# Altium PCB Jtag2UPDI.PcbDoc
Units mm, origin at the board's own origin, x right, y up, seen from the top; angles counter-clockwise.
Board outline 62.86 x 49.02 mm, 2 copper layers (Top Layer, Bottom Layer), stack 0.871 mm thick; 22 components, 22 nets, 119 pads, 17 vias.
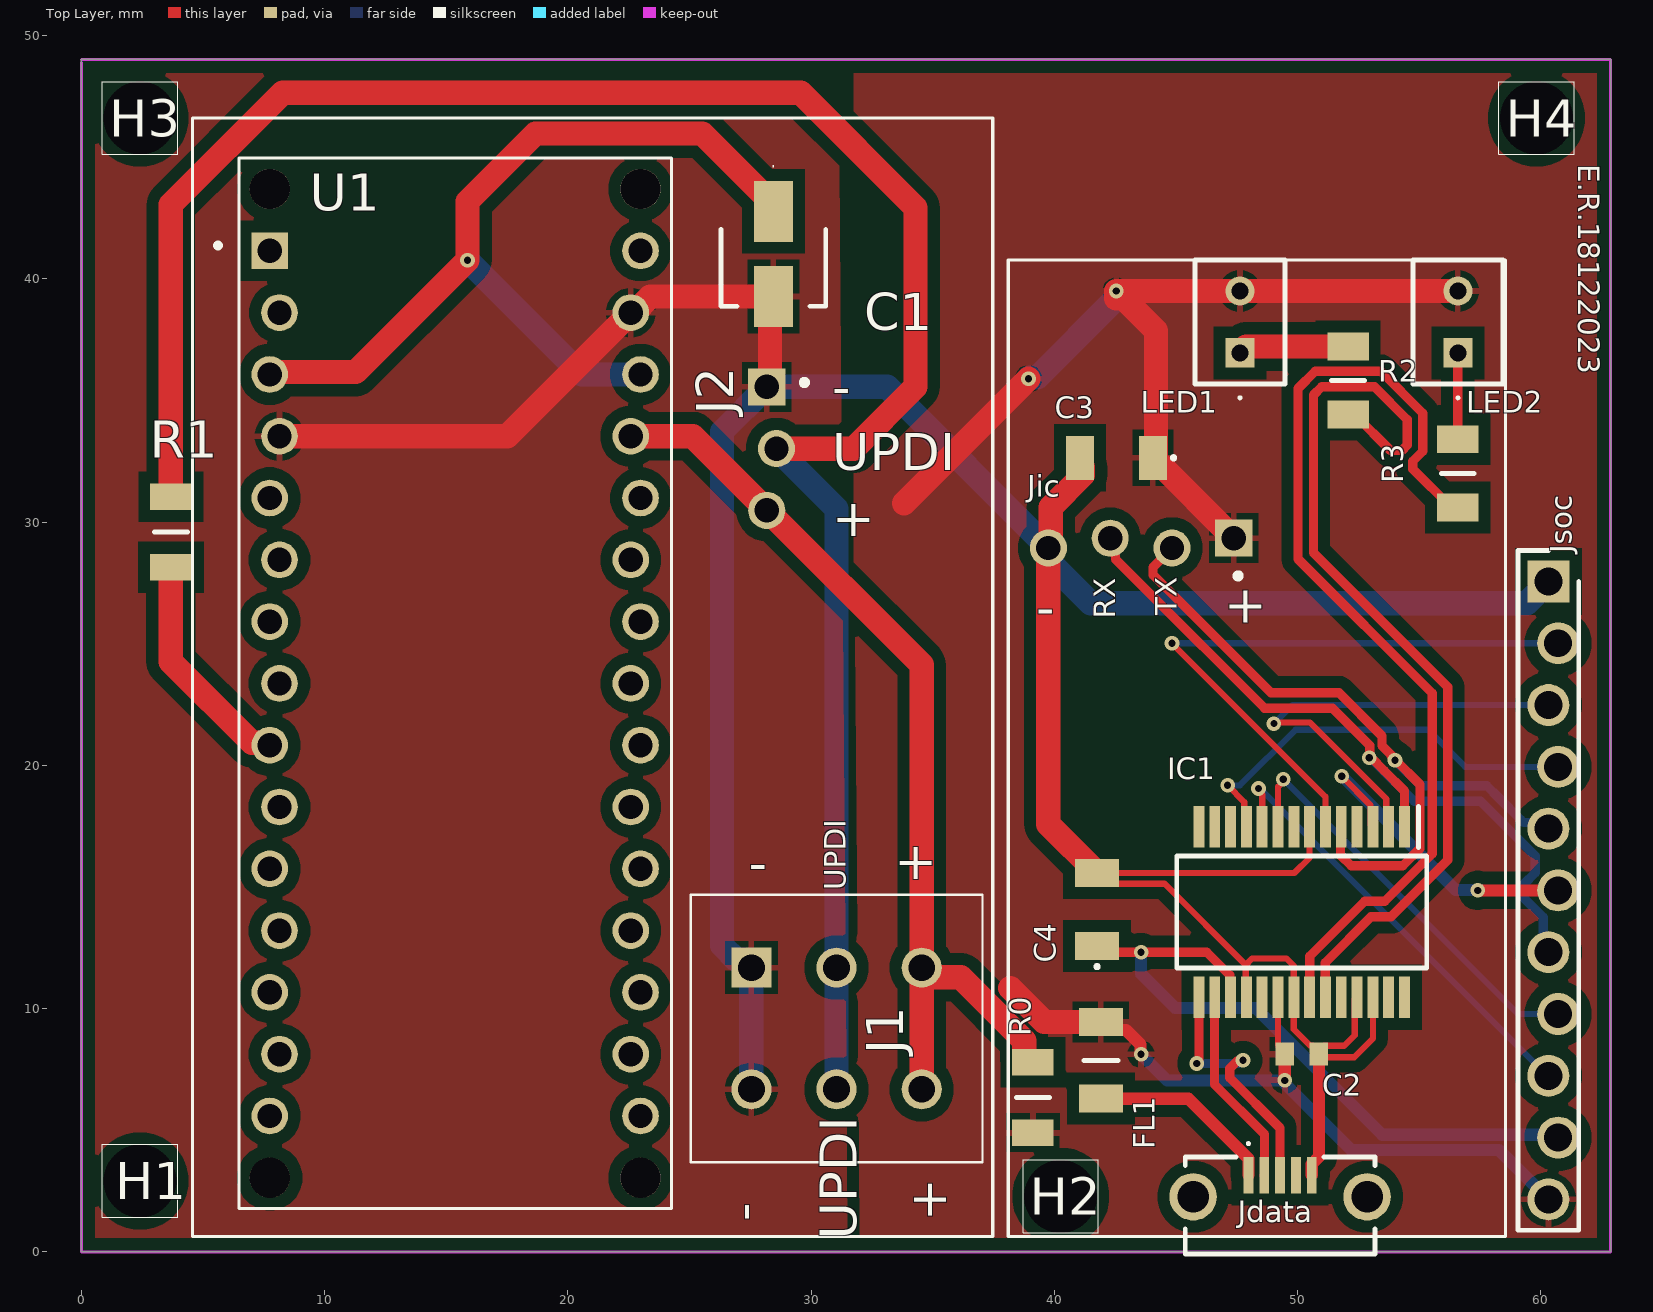
[diagram p0: Top Layer view]
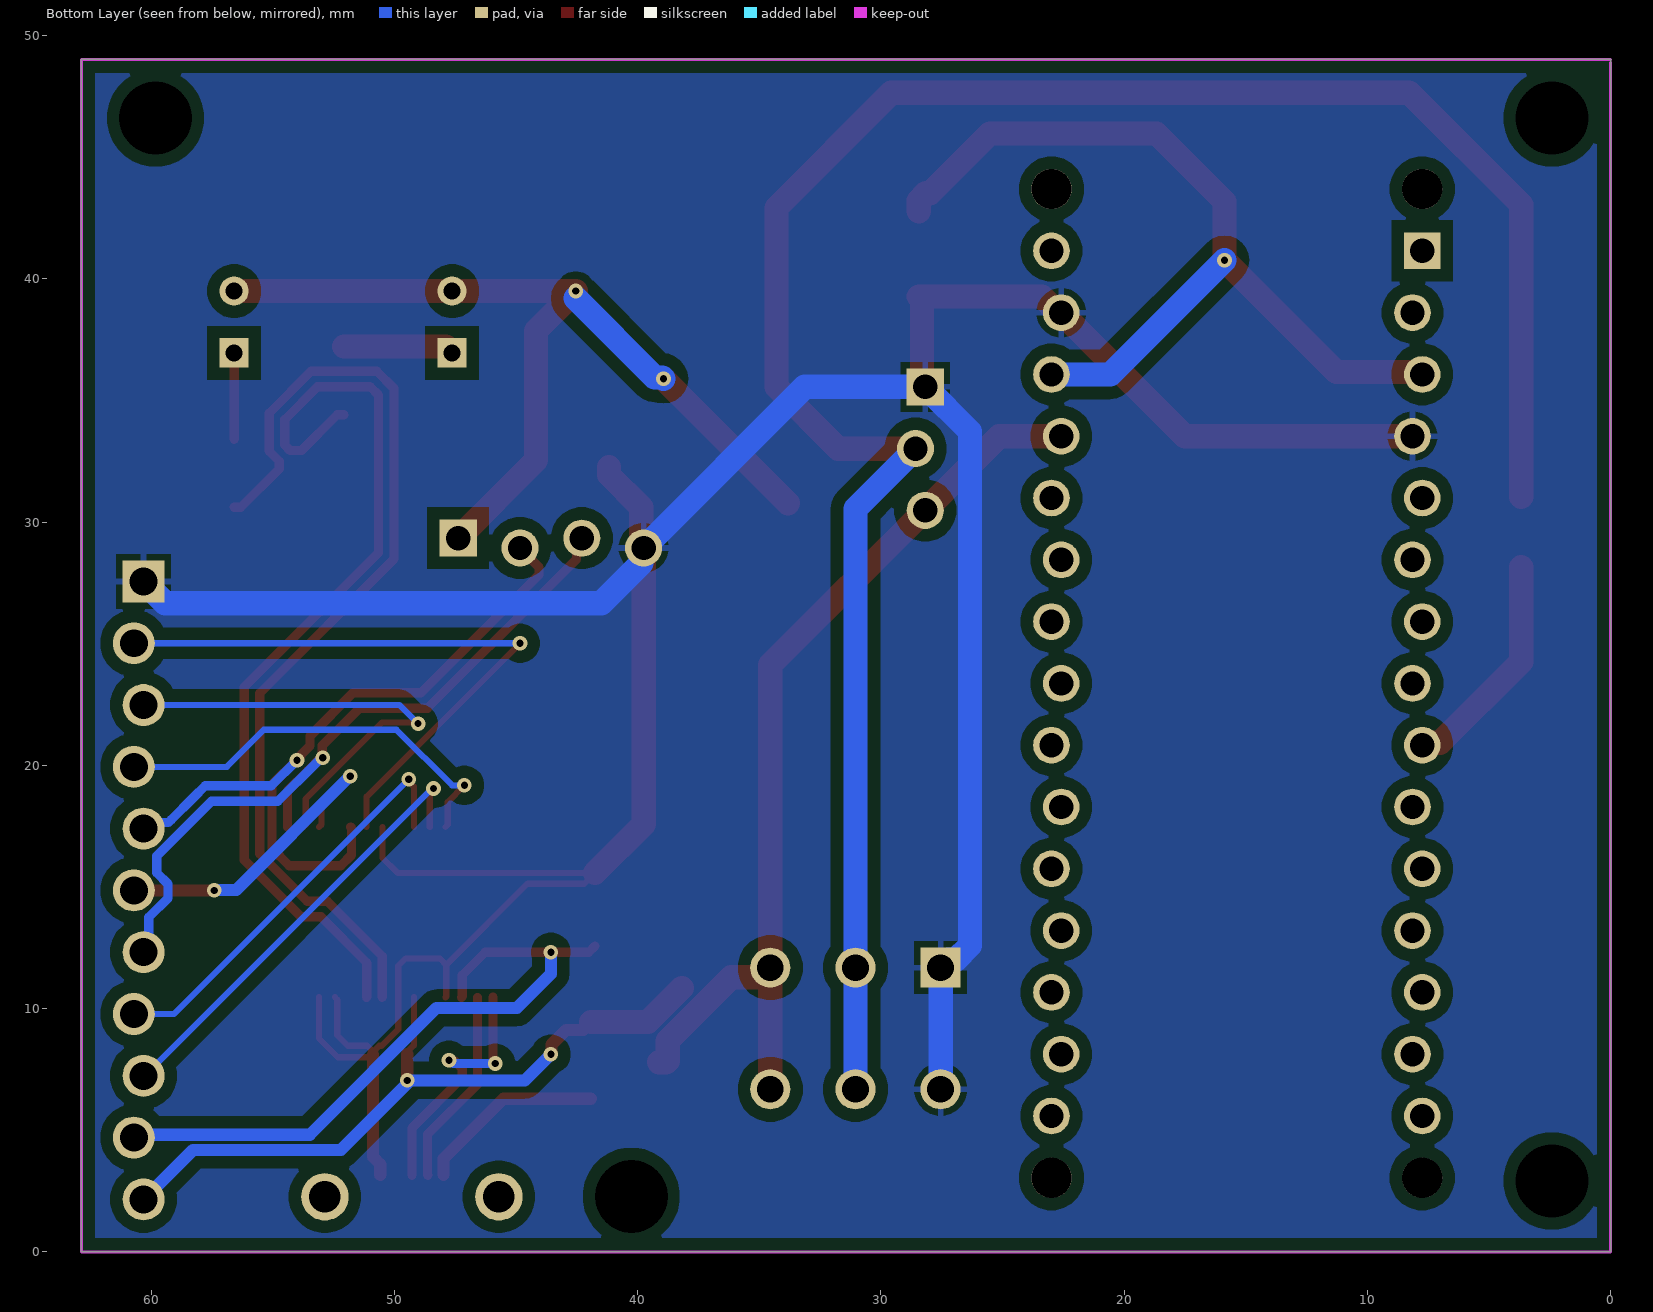
[diagram p1: Bottom Layer view, seen from below]
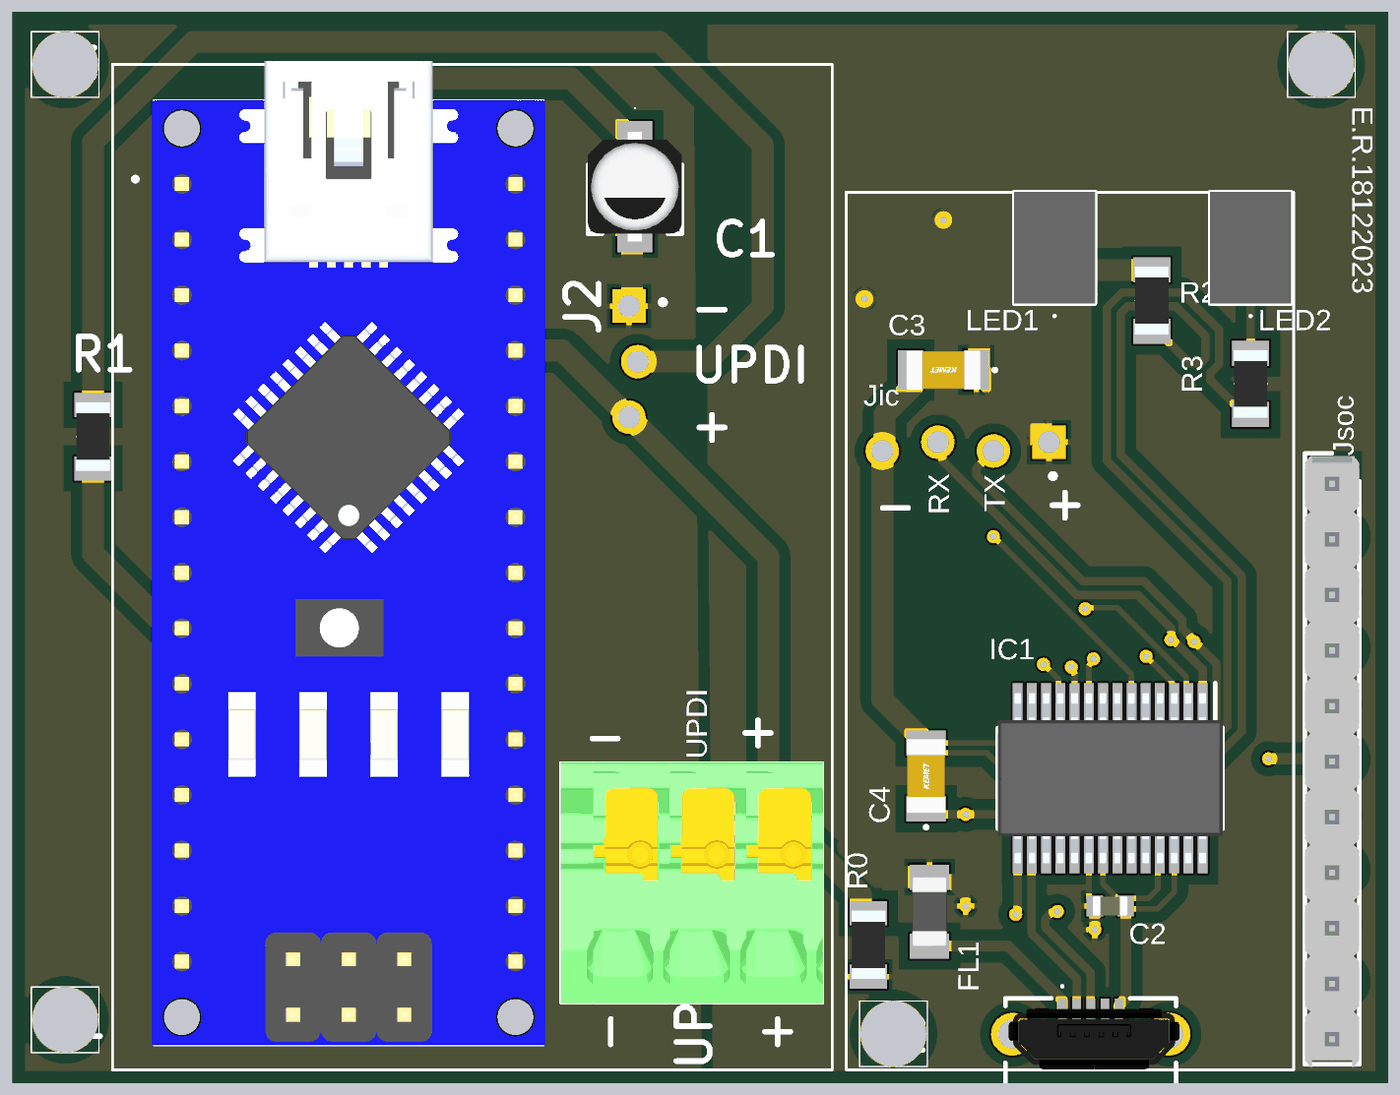
[diagram p2: 3D render of the assembled board from above, using the file's embedded part models]

## Layer stack, top to bottom
Top Solder: solder mask 0.0102, Solder Resist, Dk 3.5
Top Layer: signal copper 0.0356
Dielectric 1: dielectric 0.8, FR-4, Dk 4.8
Bottom Layer: signal copper 0.0356
Bottom Solder: solder mask 0.0102, Solder Resist, Dk 3.5

## Board outline
0,0 62.865,0 62.865,49.022 0,49.022

## Design rules (kind name [scope] priority, off if disabled: settings)
BoardOutlineClearance [All] p1: gap=0.5 ignorepadtopadclearanceinfootprint=FALSE
Clearance Clearance_1 [InPolygon] p1: gap=0.502 ignorepadtopadclearanceinfootprint=FALSE
Clearance [All] p2: gap=0.127 ignorepadtopadclearanceinfootprint=FALSE
DiffPairsRouting [All] p1: maxlimit=0.254 minlimit=0.254 mostfreqgap=0.254 toplayer_minwidth=0.381 toplayer_maxwidth=0.381 toplayer_prefwidth=0.381 bottomlayer_minwidth=0.381 bottomlayer_maxwidth=0.381 bottomlayer_prefwidth=0.381 maxuncoupledlength=12.7
HoleSize [All] p1: absolutevalues=TRUE maxlimit=2.54 minlimit=0.2 maxpercent=80.000 minpercent=20.000
Length [All] p1: maxlimit=50 minlimit=0
MatchedLengths [All] p1: tolerance=25.4 checknetsindiffpair=TRUE checkdiffpairvsdiffpair=FALSE checkxsignals=FALSE checkothers=FALSE
MaxMinImpedance [InNet('TXLED_N')] p1: minimum=1.000 maximum=100.0
ParallelSegment [All] p1: limit=254 gap=0.254
PolygonConnect [All] p1: connectstyle=Relief reliefconductorwidth=0.254 reliefentries=4 polygonreliefangle="90 Angle" airgapwidth=0.254
ReturnPath [All] p1: _gaplimit=0.1
RoutingVias [All] p1: holewidth=0.711 width=1.27 viastyle="Through Hole" minholewidth=0.711 minwidth=1.27 maxholewidth=0.711 maxwidth=1.27
SignalStimulus [All] p1: kind=2 level=0 starttime=10.00n stoptime=60.00n periodtime=100.0n
SolderMaskExpansion [All] p1: expansion=0.102 istentingtop=FALSE
SupplyNets SupplyNets_1 [InNet('5V')] p1: voltage=5.000
SupplyNets [InNet('3V3')] p2: voltage=3.300
UndershootFalling [All] p1: maximum=1.000
Width [All] p1: maxlimit=1 minlimit=0.127 preferedwidth=0.254 minimp=50.000000 maximp=50.000000 favimp=50.000000
28 further rules are at their usual default settings.

## Classes and differential pairs
differential pair TXLED: +TXLED_P -TXLED_N
differential pair Proc_TX: +Proc_TX_P -Proc_TX_N
differential pair D+: +D+_P -D+_N

## Components (designator, comment, footprint, x,y, rotation, side; value= is the part's Value field where it differs from the comment)
C1 "EEE-FN1C100R" EEE1AA220WR 28.448,41.021 r270 top value=10u
C2 "GRM188R60J106KE47D" CAPC1608X90N 50.165,8.128 r0 top
C3 "C1206C104J1RACAUTO" C1206 42.545,32.639 r180 top value=100n
C4 "12065C105KAT2A" C1206 41.753,14.078 r90 top value=1u
FL1 "BLM31KN271SN1L" BLM31KN102BH1L 41.91,7.874 r270 top
H1 "Mounting hole for key side of scarab" MTHup 2.413,2.921 r0 top
H2 "Mounting hole for key side of scarab" MTHup 40.259,2.286 r0 top
H3 "Mounting hole for key side of scarab" MTHup 2.413,46.609 r0 top
H4 "Mounting hole for key side of scarab" MTHup 59.817,46.609 r0 top
IC1 "FT232RL-REEL" SOP65P778X200-28N 50.165,13.97 r270 top
J1 "1864299" 1864299 27.544,11.684 r0 top
J2 "3PosHole" CON-PRG-3PIN 28.175,35.56 r270 top
Jdata "USB3140-30-0170-0-C" USB31403001700C 49.276,1.905 r0 top
Jic "4Pos" CON-PRG-4PIN 47.371,29.337 r180 top
Jsoc "22-28-4112" HDRV11W66P0X254_1X11_2794X249X978P 60.306,27.559 r270 top
LED1 "C5SMF-AJF-CT0U0341" C5SMFRJECU14QBB2 47.625,36.957 r270 top
LED2 "C5SMF-RJE-CU14QBB2" C5SMFRJECU14QBB2 56.584,36.957 r270 top
R0 "ERJ8GEY0R00V" RESC3116X70N 39.116,6.35 r270 top
R1 "RCC12064K70JNEA" RESC3116X70N 3.683,29.591 r90 top
R2 "RCA12061K00JNEA" RESC3116X65N 52.07,35.814 r90 top value=1K
R3 "RCA12061K00JNEA" RESC3116X65N 56.584,32.004 r90 top value=1K
U1 "ARD-NANO30" MODULE_A000005 15.367,23.368 r0 top

## Footprints (in the part's own frame and the unit in brackets; to place one, negate y for a bottom-side part, rotate by r counter-clockwise, add the part's x,y. Pads: shape width x height; smd on the part's side, far side on the other; paste and mask are expansions set on the pad)
1864299 [mm]
  rect 1.65x1.65 hole 1.1: 1(0,0)
  round 1.65 hole 1.1: 2(0,-5) 3(3.5,0) 4(3.5,-5) 5(7,0) 6(7,-5)
  silkscreen extent -2.5,-8 9.5,3, body extent -2.5,-8 9.5,3, height 11.43
BLM31KN102BH1L [mm]
  rect 1.15x1.8 smd: 1(-1.575,0) 2(1.575,0)
  silkscreen extent 0,-0.7 0,0.7, body extent -1.6,-0.8 1.6,0.8, height 1.6
C5SMFRJECU14QBB2 [mm]
  rect 1.2x1.2 hole 0.7: 1(0,0)
  round 1.2 hole 0.7: 2(-2.54,0)
  silkscreen extent -3.82,-1.85 1.9,1.85, body extent -3.82,-1.85 1.28,1.85, height 8.6
C1206 [mm]
  rect 1.15x1.8 smd: 1(-1.5,0) 2(1.5,0)
  silkscreen extent -2.4,-0.05 -2.3,0.05, body extent -1.7,-0.9 1.7,0.9, height 1.75
CAPC1608X90N [mm]
  rect 0.75x0.94 smd: 1(-0.7,0) 2(0.7,0)
  body extent -0.8,-0.45 0.8,0.45, height 0.8
CON-PRG-3PIN [mil]
  rect 60x60 hole 39.37: 1(0,0)
  round 60 hole 39.37: 2(100,15.75) 3(200,0)
  silkscreen extent -11,57 -3,65
CON-PRG-4PIN [mil]
  rect 60x60 hole 39.37: 1(0,0)
  round 60 hole 39.37: 2(100,15.75) 3(200,0) 4(300,15.75)
  silkscreen extent -11,57 -3,65
EEE1AA220WR [mm]
  rect 2.5x1.6 smd: 1(-1.75,0) 2(1.75,0)
  silkscreen extent -3.63,-2.15 2.15,2.15, body extent -2.5,-2.15 2.5,2.15, height 5.78
HDRV11W66P0X254_1X11_2794X249X978P [mm]
  rect 1.725x1.725 hole 1.15: 1(0,0)
  round 1.725 hole 1.15: 2(2.54,0.4) 3(5.08,0) 4(7.62,0.4) 5(10.16,0) 6(12.7,0.4) 7(15.24,0) 8(17.78,0.4) 9(20.32,0) 10(22.86,0.4) 11(25.4,0)
  silkscreen extent -1.27,-1.24 26.67,1.24, body extent -1.14,-1.24 26.8,1.24, height 9.92
MODULE_A000005 [mm]
  rect 1.508x1.508 / inner round 1.508 / far side rect 1.508x1.508 hole 1: 1(-7.62,17.78)
  round 1.508 hole 1: 2(-7.22,15.24) 3(-7.62,12.7) 4(-7.22,10.16) 5(-7.62,7.62) 6(-7.22,5.08) 7(-7.62,2.54) 8(-7.22,0) 9(-7.62,-2.54) 10(-7.22,-5.08) 11(-7.62,-7.62) 12(-7.22,-10.16) 13(-7.62,-12.7) 14(-7.22,-15.24) 15(-7.62,-17.78) 16(7.62,-17.78) 17(7.22,-15.24) 18(7.62,-12.7) 19(7.22,-10.16) 20(7.62,-7.62) 21(7.22,-5.08) 22(7.62,-2.54) 23(7.22,0) 24(7.62,2.54) 25(7.22,5.08) 26(7.62,7.62) 27(7.22,10.16) 28(7.62,12.7) 29(7.22,15.24) 30(7.62,17.78)
  round 1.651 hole 1.651 unplated: ""(-7.62,-20.32) ""(-7.62,20.32) ""(7.62,-20.32) ""(7.62,20.32)
  silkscreen extent -9.85,-21.59 8.89,21.59, body extent -9,-21.6 9,23.4, height 12.6
MTHup [mm] "Mounting hole of upper SCARAB"
  round 1.5 hole 3: ""(0,0)
  silkscreen extent -1.55,-1.5 1.55,1.5
RESC3116X65N [mm]
  rect 1.15x1.7 smd: 1(-1.4,0) 2(1.4,0)
  silkscreen extent 0,-0.67 0,0.67, body extent -1.55,-0.77 1.55,0.77, height 0.65
RESC3116X70N [mm]
  rect 1.1x1.7 smd: 1(-1.45,0) 2(1.45,0)
  silkscreen extent 0,-0.67 0,0.67, body extent -1.56,-0.77 1.56,0.77, height 0.7
SOP65P778X200-28N [mm]
  rect 1.7x0.45 smd: 1(-3.5,4.225) 2(-3.5,3.575) 3(-3.5,2.925) 4(-3.5,2.275) 5(-3.5,1.625) 6(-3.5,0.975) 7(-3.5,0.325) 8(-3.5,-0.325) 9(-3.5,-0.975) 10(-3.5,-1.625) 11(-3.5,-2.275) 12(-3.5,-2.925) 13(-3.5,-3.575) 14(-3.5,-4.225) 15(3.5,-4.225) 16(3.5,-3.575) 17(3.5,-2.925) 18(3.5,-2.275) 19(3.5,-1.625) 20(3.5,-0.975) 21(3.5,-0.325) 22(3.5,0.325) 23(3.5,0.975) 24(3.5,1.625) 25(3.5,2.275) 26(3.5,2.925) 27(3.5,3.575) 28(3.5,4.225)
  silkscreen extent -4.35,-5.14 2.3,5.14, body extent -3.89,-5.14 3.89,5.14, height 2
USB31403001700C [mm]
  rect 0.4x1.5 smd: 1(-1.3,1.25) 2(-0.65,1.25) 3(0,1.25) 4(0.65,1.25) 5(1.3,1.25)
  round 1.95 hole 1.3: MH1(-3.575,0.36) MH2(3.575,0.36)
  silkscreen extent -3.9,-2 3.9,2.6, body extent -3.75,-1.86 4.06,2.14, height 5.23

## Part data
C1: library part EL-10uF, "Aluminium Electrolytic Capacitors - SMD 16VDC 10uF 20% 90mA AEC-Q200", Manufacturer_Name=Panasonic, Mouser Part Number=667-EEE-FN1C100R, Arrow Part Number=EEE-FN1C100R, Arrow Price/Stock=https://www.arrow.com/en/products/eee-fn1c100r/panasonic, Datasheet Link=http://industrial.panasonic.com/cdbs/www-data/pdf/RDE0000/RDE0000C1259.pdf, Height=5.5mm, Manufacturer_Part_Number=EEE-FN1C100R, Mouser Price/Stock=https://www.mouser.co.uk/ProductDetail/Panasonic/EEE-FN1C100R?qs=OlC7AqGiEDkM1emDreS51w%3D%3D, Supplier 1=Mouser, Supplier Part Number 1=667-EEE-FN1C100R
C2: "Capacitor", Manufacturer_Name="Murata Electronics", Mouser Part Number=81-GRM188R60J106KE7D, Arrow Part Number=GRM188R60J106KE47D, Arrow Price/Stock=https://www.arrow.com/en/products/grm188r60j106ke47d/murata-manufacturing?region=nac, Datasheet Link=https://search.murata.co.jp/Ceramy/image/img/A01X/G101/ENG/GRM188R60J106KE47-02.pdf, Height=0.9mm, Manufacturer_Part_Number=GRM188R60J106KE47D, Mouser Price/Stock=https://www.mouser.co.uk/ProductDetail/Murata-Electronics/GRM188R60J106KE47D?qs=OezBPCAUt14%252Bu%252BtP1j3sig%3D%3D, Supplier 1=Mouser, Supplier Part Number 1=81-GRM188R60J106KE7D
C3: library part 100nF, "Multilayer Ceramic Capacitors MLCC - SMD/SMT 100V 0.1uF X7R 1206 5% AEC-Q200", Manufacturer_Name=KEMET, Mouser Part Number=80-C1206C104J1RAUTO, Datasheet Link=https://content.kemet.com/datasheets/KEM_C1023_X7R_AUTO_SMD.pdf, Manufacturer_Part_Number=C1206C104J1RACAUTO, Mouser Price/Stock=https://www.mouser.co.uk/ProductDetail/KEMET/C1206C104J1RACAUTO?qs=ds50AKTGxA9j0bB4hqTS6Q%3D%3D, Supplier 1=Mouser, Supplier Part Number 1=80-C1206C104J1RAUTO
C4: library part 1uF1206, "Multilayer Ceramic Capacitors MLCC - SMD/SMT NEW GLOBAL PN KGM31HR71H105KU 50V 1uF X7R 1206 10%", Manufacturer_Name=KEMET, Manufacturer_Part_Number=C1206C104J1RACAUTO, Mouser Part Number=80-C1206C104J1RAUTO, Supplier Part Number 1=581-12065C105KAT2A, Datasheet Link=https://content.kemet.com/datasheets/KEM_C1023_X7R_AUTO_SMD.pdf, Mouser Price/Stock=https://www.mouser.co.uk/ProductDetail/KEMET/C1206C104J1RACAUTO?qs=ds50AKTGxA9j0bB4hqTS6Q%3D%3D, Supplier 1=Mouser
FL1: library part FB_270OHM_4A5, "Ferrite Beads 270 OHM 4.5A Alternate Sizing Guide Below", Manufacturer_Name="Murata Electronics", Mouser Part Number=81-BLM31KN271SN1L, Arrow Part Number=BLM31KN271SN1L, Arrow Price/Stock=https://www.arrow.com/en/products/blm31kn271sn1l/murata-manufacturing?region=nac, Datasheet Link=https://www.murata.com/en-us/products/productdetail?partno=BLM31KN271SN1%23, Height=1.8mm, Manufacturer_Part_Number=BLM31KN271SN1L, Mouser Price/Stock=https://www.mouser.co.uk/ProductDetail/Murata-Electronics/BLM31KN271SN1L?qs=EU6FO9ffTwcEvcRcNMANJA%3D%3D, Supplier 1=Mouser, Supplier Part Number 1=81-BLM31KN271SN1L
H1 H2: library part MountHole_SCARABup, Supplier Part Number 1=855-R25-3002002, Supplier 1=Mouser
H3 H4: library part MountHole_SCARABup, Supplier Part Number 1=144-04M025045HN, Supplier 1=Mouser
IC1: library part FT232RL, "USB Interface IC USB to Serial UART Enhanced IC SSOP-28", Manufacturer_Name="FTDI Chip", Mouser Part Number=895-FT232RL, Arrow Part Number=FT232RL-REEL, Arrow Price/Stock=https://www.arrow.com/en/products/ft232rl-reel/ftdi-chip?region=nac, Datasheet Link=http://www.ftdichip.com/Support/Documents/DataSheets/ICs/DS_FT232R.pdf, Height=2mm, Manufacturer_Part_Number=FT232RL-REEL, Mouser Price/Stock=https://www.mouser.co.uk/ProductDetail/FTDI/FT232RL-REEL?qs=D1%2FPMqvA103RC6OU6bKtoA%3D%3D, Supplier 1=Mouser, Supplier Part Number 1=895-FT232RL
J1: "Connector", Manufacturer_Name="Phoenix Contact", Mouser Part Number=651-1864299, Arrow Part Number=1864299, Arrow Price/Stock=https://www.arrow.com/en/products/1864299/phoenix-contact?region=nac, Datasheet Link=https://datasheet.datasheetarchive.com/originals/distributors/DKDS-31/613776.pdf, Height=10.9mm, Manufacturer_Part_Number=1864299, Mouser Price/Stock=https://www.mouser.co.uk/ProductDetail/Phoenix-Contact/1864299?qs=K5ytOU5dogrwHSrEygz0tw%3D%3D, Supplier 1=Mouser, Supplier Part Number 1=651-1864299
Jdata: library part USB_B_Micro, "USB Connectors Micro B Skt, Vertical, SMT, 30u\", W/1.7mm stake, no MEF, T&R+cap", Manufacturer_Name="GCT (GLOBAL CONNECTOR TECHNOLOGY)", Mouser Part Number=640-USB31403001700C, Supplier Part Number 1=7088906, Datasheet Link=https://gct.co/files/drawings/usb3140.pdf, Height=6.7mm, Manufacturer_Part_Number=USB3140-30-0170-0-C, Mouser Price/Stock=https://www.mouser.co.uk/ProductDetail/GCT/USB3140-30-0170-0-C?qs=KUoIvG%2F9IlYQ5y%252BQm2TPIg%3D%3D, Supplier 1="Future Electronics"
Jsoc: "Connector", Manufacturer_Name=Molex, Mouser Part Number=538-22-28-4112, Datasheet Link=https://gr.mouser.com/datasheet/2/276/3/0022284112_PCB_HEADERS-2870009.pdf, Height=9.78mm, Manufacturer_Part_Number=22-28-4112, Mouser Price/Stock=https://www.mouser.co.uk/ProductDetail/Molex/22-28-4112?qs=GAPJcf4kvdtiO4x%252B%2FrzvFw%3D%3D
LED1: library part LED_Y, "Standard LEDs - Through Hole Amber Oval", Manufacturer_Name="CREE LED", Manufacturer_Part_Number=C5SMF-RJE-CU14QBB2, Mouser Part Number=941-C5SMFRJECU14QBB2, Supplier Part Number 1=941-C5SMFAJFCT0U0341, Datasheet Link=http://www.cree.com/led-components/media/documents/C5SMF-RJF-RJE-GJF-GJE-BJF-BJE-1240.pdf, Height=8.5mm, Mouser Price/Stock=https://www.mouser.co.uk/ProductDetail/Cree-Inc/C5SMF-RJE-CU14QBB2?qs=1sbE9T7hb3YsVvX6UAERxA%3D%3D, Supplier 1=Mouser
LED2: library part LED_R, "LED", Manufacturer_Name="CREE LED", Mouser Part Number=941-C5SMFRJECU14QBB2, Datasheet Link=http://www.cree.com/led-components/media/documents/C5SMF-RJF-RJE-GJF-GJE-BJF-BJE-1240.pdf, Height=8.5mm, Manufacturer_Part_Number=C5SMF-RJE-CU14QBB2, Mouser Price/Stock=https://www.mouser.co.uk/ProductDetail/Cree-Inc/C5SMF-RJE-CU14QBB2?qs=1sbE9T7hb3YsVvX6UAERxA%3D%3D, Supplier 1=Mouser, Supplier Part Number 1=941-C5SMFRJECU14QBB2
R0: library part 0Ohm1206, "Thick Film Resistors - SMD 1206 Zero ohm Jumper 0.05 AEC-Q200", Manufacturer_Name=Panasonic, Supplier Part Number 1=667-ERJ-8GEY0R00V, Datasheet Link=https://datasheet.datasheetarchive.com/originals/distributors/SFDatasheet-1/sf-00039130.pdf, Height=0.7mm, Manufacturer_Part_Number=ERJ8GEY0R00V, Supplier 1=Mouser
R1: library part R4K7, "Thick Film Resistors - SMD 4.7Kohms 1% 100ppm", Manufacturer_Name=Panasonic, Manufacturer_Part_Number=ERJ8GEY0R00V, Supplier Part Number 1=71-RCC12064K70JNEA, Datasheet Link=https://datasheet.datasheetarchive.com/originals/distributors/SFDatasheet-1/sf-00039130.pdf, Height=0.7mm, Supplier 1=Mouser
R2 R3: library part 1K, "Thick Film Resistors - SMD RCA1206 1K0 5% 200 ET1 e3", Manufacturer_Name=Panasonic, Manufacturer_Part_Number=ERJ8GEY0R00V, Supplier Part Number 1=71-RCA12061K00JNEA, Datasheet Link=https://datasheet.datasheetarchive.com/originals/distributors/SFDatasheet-1/sf-00039130.pdf, Height=0.7mm, Supplier 1=Mouser
U1: library part A000005, "Small, complete, and breadboard-friendly board based on the ATmega328 (Arduino Nano 3.x).", Package="Non-Standard Arduino", Supplier Part Number 1=992-ARD-NANO30, Availability="In Stock", Check_prices=https://www.snapeda.com/parts/A000005/Arduino/view-part/?ref=eda, MF=Arduino, MP=A000005, Price=None, Purchase-URL=https://pricing.snapeda.com/search/part/A000005/?ref=eda, SnapEDA_Link=https://www.snapeda.com/parts/A000005/Arduino/view-part/?ref=snap, Supplier 1=Mouser

## Via types
v1: diameter 0.6, hole 0.3, Top Layer to Bottom Layer, 17 vias

## Nets (pads, with @x,y where several pads share a name; then routed paths per layer and width w, separated by ;. In a path a pad name is that pad's centre, name@x,y a point inside that pad or via, vN(x,y) a via of type N, cw(c..) or ccw(c..) an arc to the next point about the centre after c; other vN are vias at no path point)
3V3: C4.1 IC1.17 Jsoc.10 | length 27.7
  Top Layer w0.381: C4.1 42.012,12.319 v1(43.561,12.319) 46.265,12.319 47.205,11.379 47.205,10.505 IC1.17
  Bottom Layer w0.5: v1(43.561,12.319) 43.561,11.43 44.958,10.033 48.26,10.033 53.475,4.818 60.587,4.818 Jsoc.10
5V: J1.5 J1.6 J2.3 R0.1 U1.27 | length 40.2
  Top Layer w1: U1.27 25.127,33.528 J2.3 ; J2.3@28.013,30.661 34.544,24.13 J1.5 ; J1.6 J1.5 ; R0.1 38.816,7.8 38.766,7.85 38.766,8.675 36.154,11.287 35.117,11.287 34.72,11.684 J1.5
5Vt: C2.1 C3.1 FL1.1 IC1.20 Jic.1 Jsoc.11 LED1.2 LED2.2 R0.2 | length 68.5
  Top Layer w0.254: IC1.20 49.19,8.498 49.465,8.223 C2.1
  Top Layer w0.5: FL1.1 42.235,9.124 42.946,9.124 43.542,8.528 43.542,8.147 v1(43.561,8.128) ; v1(49.465,7.05) C2.1 ; Jsoc.11@60,2.159 Jsoc.11
  Top Layer w1: 33.817,30.769 v1(38.935,35.887) ; 38.185,10.849 39.586,9.449 FL1.1 ; 42.545,39.196 v1(42.545,39.497) ; Jic.1 44.172,32.536 44.172,37.87 v1(42.545,39.497) ; LED2.2 LED1.2 v1(42.545,39.497)
  Bottom Layer w0.5: v1(43.561,8.128) 44.639,7.05 v1(49.465,7.05) ; v1@49.408,6.98 52.197,4.191 58.274,4.191 Jsoc.11
  Bottom Layer w1: v1(38.935,35.887) 38.989,35.941 39.29,35.941 42.545,39.196
CTS: IC1.11 Jsoc.4 | length 17.2
  Top Layer w0.254: v1(47.117,19.177) 47.804,18.49 47.804,17.556 IC1.11
  Bottom Layer w0.254: v1(47.117,19.177) 47.625,19.177 49.911,21.463 55.363,21.463 56.887,19.939 Jsoc.4
D+_N: IC1.16 Jdata.2 | length 8.2
  Top Layer w0.381: IC1.16@46.575,10.455 46.575,9.398 46.575,7.493 46.575,6.892 48.633,4.834 48.633,4.445 48.633,3.841 48.633,3.163 Jdata.2
D+_P: IC1.15 Jdata.3 | length 10.6
  Top Layer w0.381: v1(45.847,7.747) 45.847,7.806 45.94,7.899 IC1.15 ; v1(47.752,7.874) 47.71,7.832 47.501,7.832 47.21,7.541 47.21,7.493 47.21,7.155 49.268,5.097 49.268,4.445 49.268,3.841 49.268,3.163 Jdata.3
  Bottom Layer w0.381: v1(45.847,7.747) 47.566,7.747 47.693,7.874 v1(47.752,7.874)
DCD: IC1.10 Jsoc.9 | length 18.5
  Top Layer w0.254: v1(48.387,19.05) 48.387,18.956 48.54,18.803 IC1.10
  Bottom Layer w0.254: v1(48.387,19.05) 48.441,19.05 60.252,7.239 Jsoc.9
DSR: IC1.9 Jsoc.8 | length 17.4
  Top Layer w0.254: IC1.9 49.19,19.124 49.403,19.337 v1(49.403,19.431)
  Bottom Layer w0.254: v1(49.403,19.431) 59.055,9.779 Jsoc.8
DTR: IC1.2 Jsoc.3 | length 18.7
  Top Layer w0.254: v1(49.022,21.717) 49.069,21.764 50.499,21.764 53.642,18.621 53.642,17.568 IC1.2
  Bottom Layer w0.254: v1(49.022,21.717) 49.784,22.479 Jsoc.3
GND: C1.2 C2.2 C3.2 C4.2 IC1.7 IC1.18 IC1.21 IC1.25 IC1.26 J1.1 J1.2 J2.1 Jdata.5 Jic.4 Jsoc.1 U1.4 U1.29 | length 149.8
  Top Layer w0.254: IC1.18 47.862,10.498 47.862,11.794 ; IC1.7 50.49,16.2 49.868,15.578 C4.2 42.201,15.13 44.526,15.13 47.862,11.794 ; IC1.25 52.342,10.372 52.342,8.908 51.905,8.471 51.113,8.471 C2.2@50.865,8.223 ; IC1.26 53.09,8.767 52.324,8.001 50.992,8.001 50.878,8.115 C2.2 C2.2@50.865,8.223 ; 47.862,11.794 48.133,12.065 49.53,12.065 49.84,11.755 IC1.21 49.84,9.153 50.522,8.471 50.617,8.471 C2.2@50.865,8.223
  Top Layer w0.5: Jdata.5 50.576,3.605 50.878,3.907 C2.2@50.878,8.115
  Top Layer w1: U1.4 17.507,33.528 U1.29 22.724,38.608 23.387,39.271 C1.2 28.312,39.135 28.312,35.696 J2.1 ; C3.2@41.172,32.258 41.172,31.933 39.851,30.612 39.851,29.037 Jic.4 39.751,17.58 C4.2
  Bottom Layer w1: J1.2 J1.1 27.219,12.009 26.922,12.009 26.336,12.595 26.336,33.721 J2.1 33.128,35.56 Jic.4 39.851,28.837 39.851,28.307 41.488,26.67 59.417,26.67 Jsoc.1
NetFL1_2: FL1.2 Jdata.1 | length 7.8
  Top Layer w0.5: FL1.2 45.51,6.299 47.976,3.833 Jdata.1
NetLED1_1: LED1.1 R2.2 | length 4.6
  Top Layer w1: LED1.1 47.882,37.214 R2.2
NetLED2_1: LED2.1 R3.2 | length 3.6
  Top Layer w0.381: R3.2 LED2.1
NetR1_1: R1.1 U1.9 | length 9.4
  Top Layer w1: R1.1 3.683,24.257 7.015,20.925 7.65,20.925 U1.9
Proc_TX_N: IC1.5 Jic.2 Jsoc.5 | length 31.7
  Top Layer w0.381: Jic.2@44.831,29.137 Jic.2 44.831,28.918 44.055,28.142 44.055,27.827 44.069,27.813 48.902,22.98 51.696,22.98 53.467,21.209 53.467,20.804 53.997,20.274 v1(53.997,20.215) ; IC1.5 51.757,17.437 51.757,16.315 52.197,15.875 54.319,15.875 55.025,16.581 55.025,18.83 55.025,19.211 54.01,20.227 v1@53.819,20.418
  Bottom Layer w0.381: v1(53.997,20.215) 55.052,19.16 57.775,19.16 58.255,18.68 59.171,17.763 59.288,17.647 60.058,17.647 Jsoc.5
Proc_TX_P: IC1.1 Jic.3 Jsoc.7 | length 31.5
  Top Layer w0.381: Jic.3@42.491,29.337 42.491,28.629 42.51,28.61 42.51,28.474 43.243,27.741 43.62,27.364 48.639,22.345 51.433,22.345 52.959,20.819 52.959,20.701 v1@52.959,20.329 ; v1@52.959,20.32 53.018,20.32 53.561,19.778 54.39,18.948 54.39,18.195 IC1.1
  Bottom Layer w0.381: v1(52.94,20.309) 52.999,20.309 53.249,20.059 53.254,20.059 54.789,18.525 57.512,18.525 57.806,18.231 58.722,17.314 59.765,16.272 59.765,15.586 59.303,15.125 59.303,14.541 60.091,13.753 60.091,12.534 Jsoc.7
ResetPin: C1.1 U1.3 U1.28 | length 36.9
  Top Layer w1: U1.3 7.844,36.165 11.273,36.165 v1(15.875,40.767) 15.875,43.18 18.669,45.974 25.527,45.974 27.98,43.521 28.148,43.521 28.448,43.221 C1.1
  Bottom Layer w1: v1(15.875,40.767) 20.574,36.068 U1.28
RI: IC1.6 Jsoc.2 | length 26
  Top Layer w0.254: v1(44.831,25.019) 51.14,18.71 IC1.6
  Bottom Layer w0.254: v1(44.831,25.019) Jsoc.2
RTS: IC1.3 Jsoc.6 | length 13.5
  Top Layer w0.254: v1(51.805,19.547) 52.992,18.361 52.992,17.568 IC1.3
  Top Layer w0.5: v1(57.404,14.859) Jsoc.6
  Bottom Layer w0.5: v1(51.805,19.547) 51.827,19.547 56.496,14.878 57.385,14.878 v1(57.404,14.859)
TXLED_N: IC1.22 R3.1 | length 41
  Top Layer w0.381: IC1.22 50.497,10.477 50.497,12.155 52.753,14.41 53.572,14.41 55.533,16.371 55.533,22.961 50.013,28.481 50.013,35.489 50.72,36.196 53.42,36.196 55.141,34.475 55.141,32.906 54.732,32.497 54.732,32.181 56.309,30.604 R3.1
TXLED_P: IC1.23 R2.1 | length 38.3
  Top Layer w0.381: IC1.23 51.132,10.477 51.132,11.892 53.016,13.775 53.835,13.775 56.168,16.108 56.168,23.224 50.648,28.744 50.648,35.226 50.983,35.561 53.157,35.561 54.506,34.211 54.506,33.169 54.283,32.946 53.813,32.946 52.345,34.414 R2.1
UPDI: J1.3 J1.4 J2.2 R1.2 | length 88
  Top Layer w1: R1.2 3.683,43.053 8.278,47.648 29.568,47.648 34.29,42.926 34.29,35.56 31.75,33.02 J2.2
  Bottom Layer w1: J2.2 31.044,30.551 J1.3 J1.4
pads on no net: H1. H2. H3. H4. IC1.4 IC1.8 IC1.12 IC1.13 IC1.14 IC1.19 IC1.24 IC1.27 IC1.28 Jdata.4 Jdata.MH1 Jdata.MH2 U1. U1.1 U1.2 U1.5 U1.6 U1.7 U1.8 U1.10 U1.11 U1.12 U1.13 U1.14 U1.15 U1.16 U1.17 U1.18 U1.19 U1.20 U1.21 U1.22 U1.23 U1.24 U1.25 U1.26 U1.30

## Polygon pours and split planes (outlines as drawn)
GND on Bottom Layer "GND_L02_P000" (solid, remove dead copper, pour order 0): 0,0 62.865,0 62.865,49.022 0,49.022
5Vt on Top Layer "5VT_L01_P002" (solid, remove dead copper, pour order 2): 62.865,49.022 31.496,49.022 31.75,49.276 31.75,-0.127 62.865,-0.127
GND on Top Layer "GND_L01_P001" (solid, remove dead copper, pour order 1): 31.496,0.127 0,0.127 0,49.022 31.115,49.022

## Keep-outs
Keep-Out Layer:
  lines w0.127: 0,48.895 0,0 62.865,0 62.865,49.022 0,49.022

## Silkscreen, mask and mechanical layers (free items; w line width, h text height)
Top Overlay:
  lines w0.127: 4.572,0.635 4.572,46.609 37.465,46.609 37.465,0.635 4.572,0.635 ; 38.1,0.635 38.1,40.767 58.547,40.767 58.547,0.635 38.1,0.635
  text "E.R.18122023" at 61.231,44.704 h1.52 r270
  text "-" at 30.861,34.798 h1.52
  text "UPDI" at 30.861,32.131 h1.52
  text "+" at 30.861,29.418 h1.52
  text "TX" at 45.339,26.162 h1.52 r90
  text "RX" at 42.799,26.035 h1.52 r90
  text "+" at 46.99,25.862 h1.52
  text "-" at 39.243,25.736 h1.52
  text "+" at 35.179,16.637 h1.52 r180
  text "-" at 28.194,16.383 h1.52 r180
  text "UPDI" at 31.733,14.859 h1.52 r90
  text "-" at 27.94,1.27 h1.52 r90
  text "+" at 35.56,1.27 h1.52 r90
  text "UPDI" at 31.877,0.508 h1.52 r90